# Altium PCB pcb.PcbDoc
Units mm, origin at the board's own origin, x right, y up, seen from the top; angles counter-clockwise.
Board outline 65 x 45 mm, 2 copper layers (Top Layer, Bottom Layer); 21 components, 15 nets, 84 pads, 0 vias.
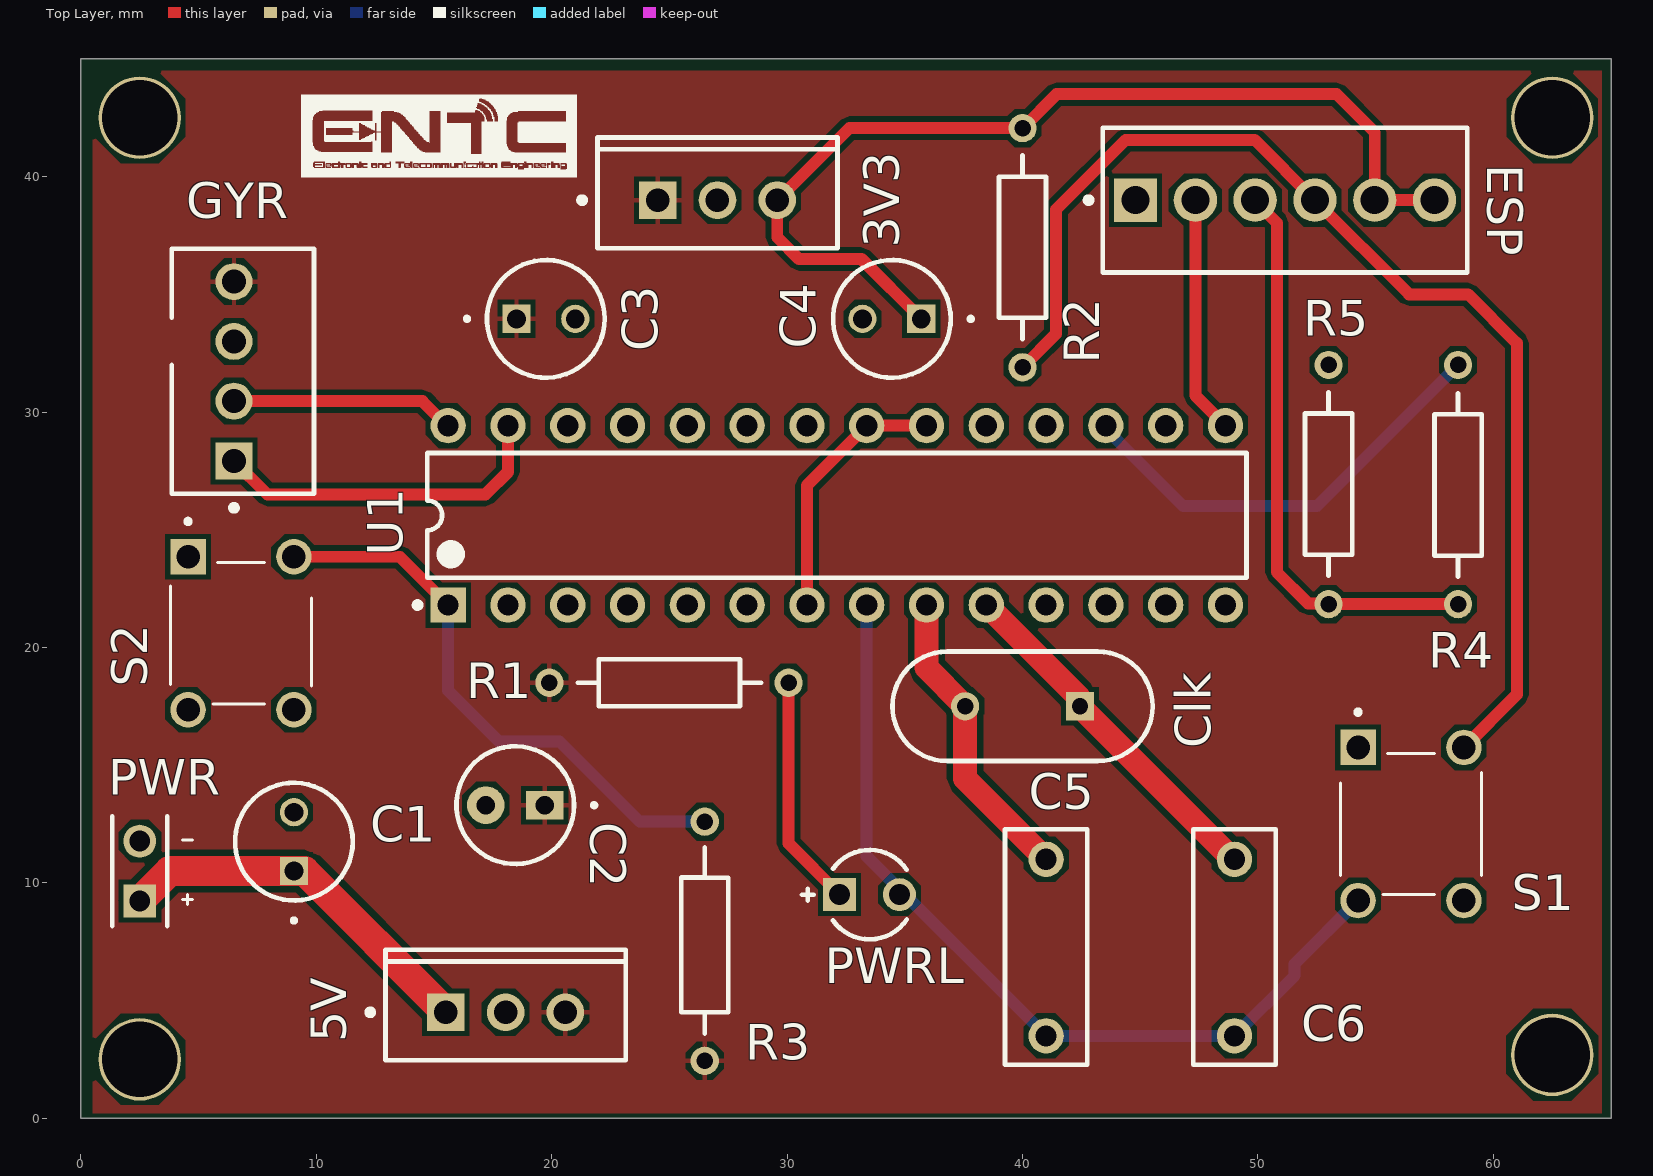
[diagram p0: Top Layer view]
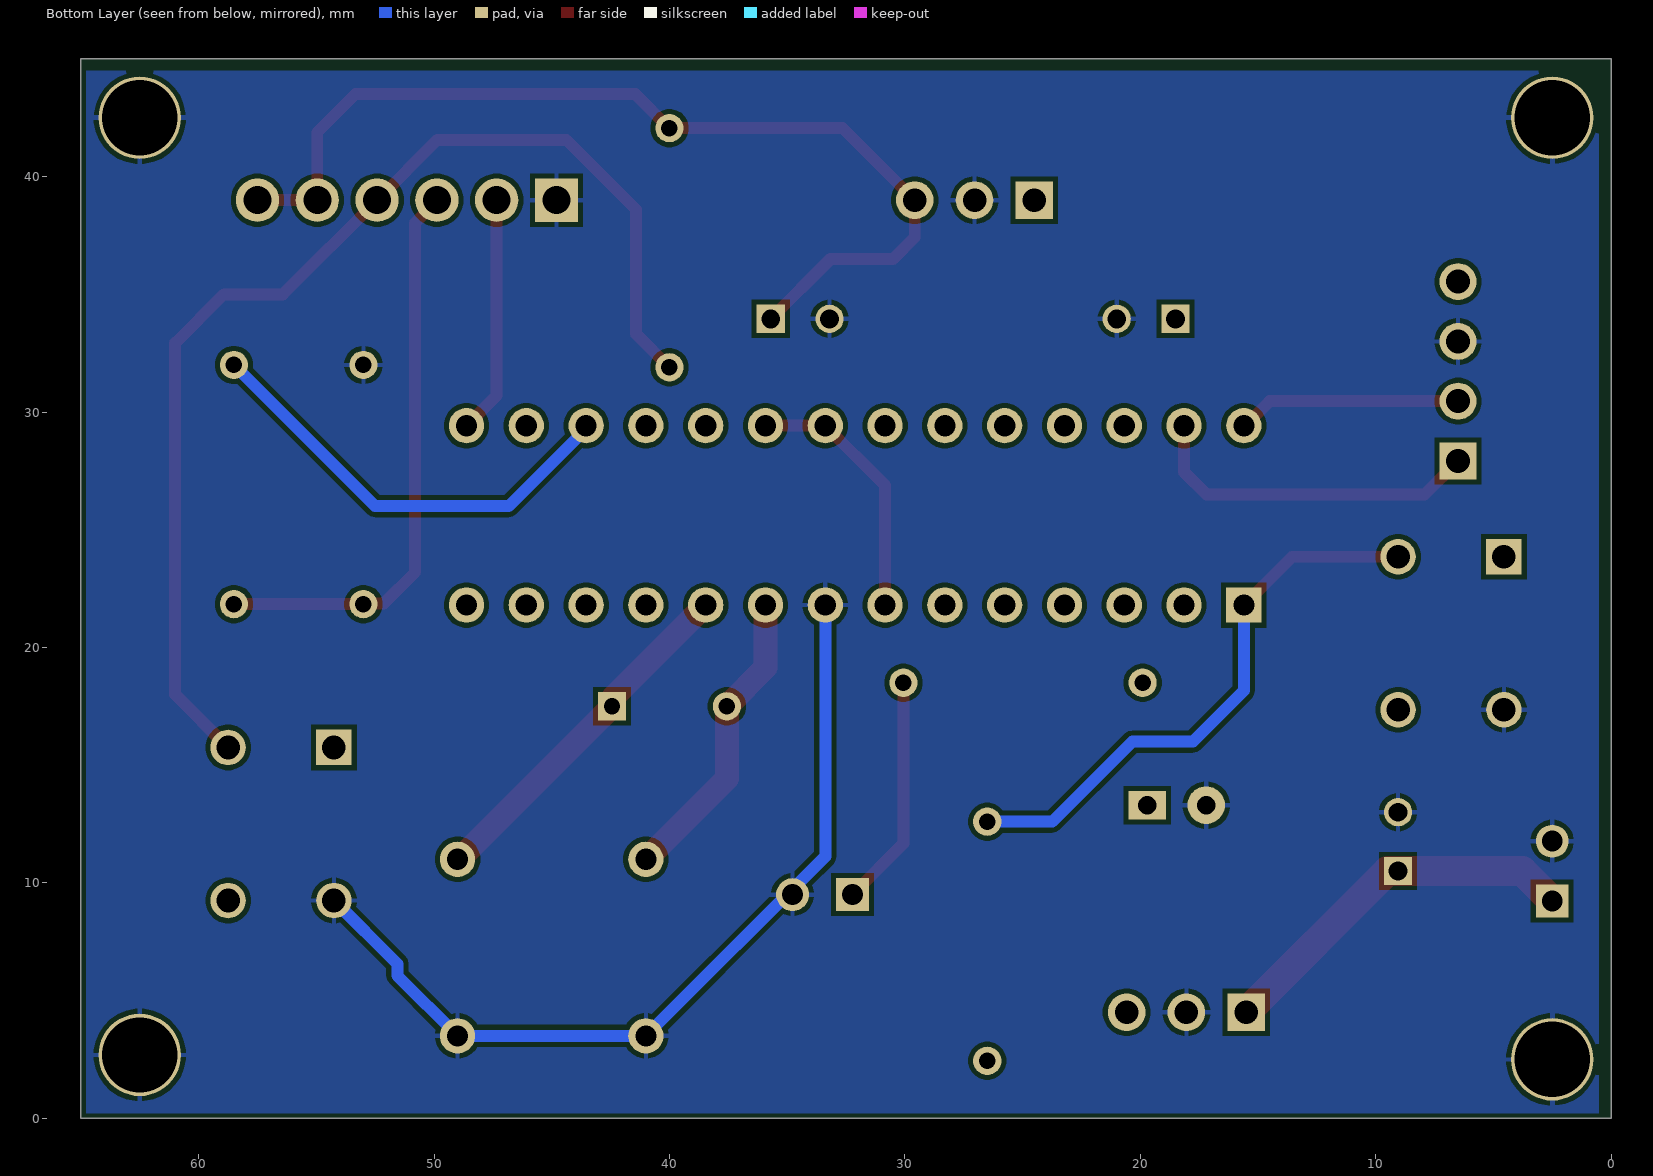
[diagram p1: Bottom Layer view, seen from below]
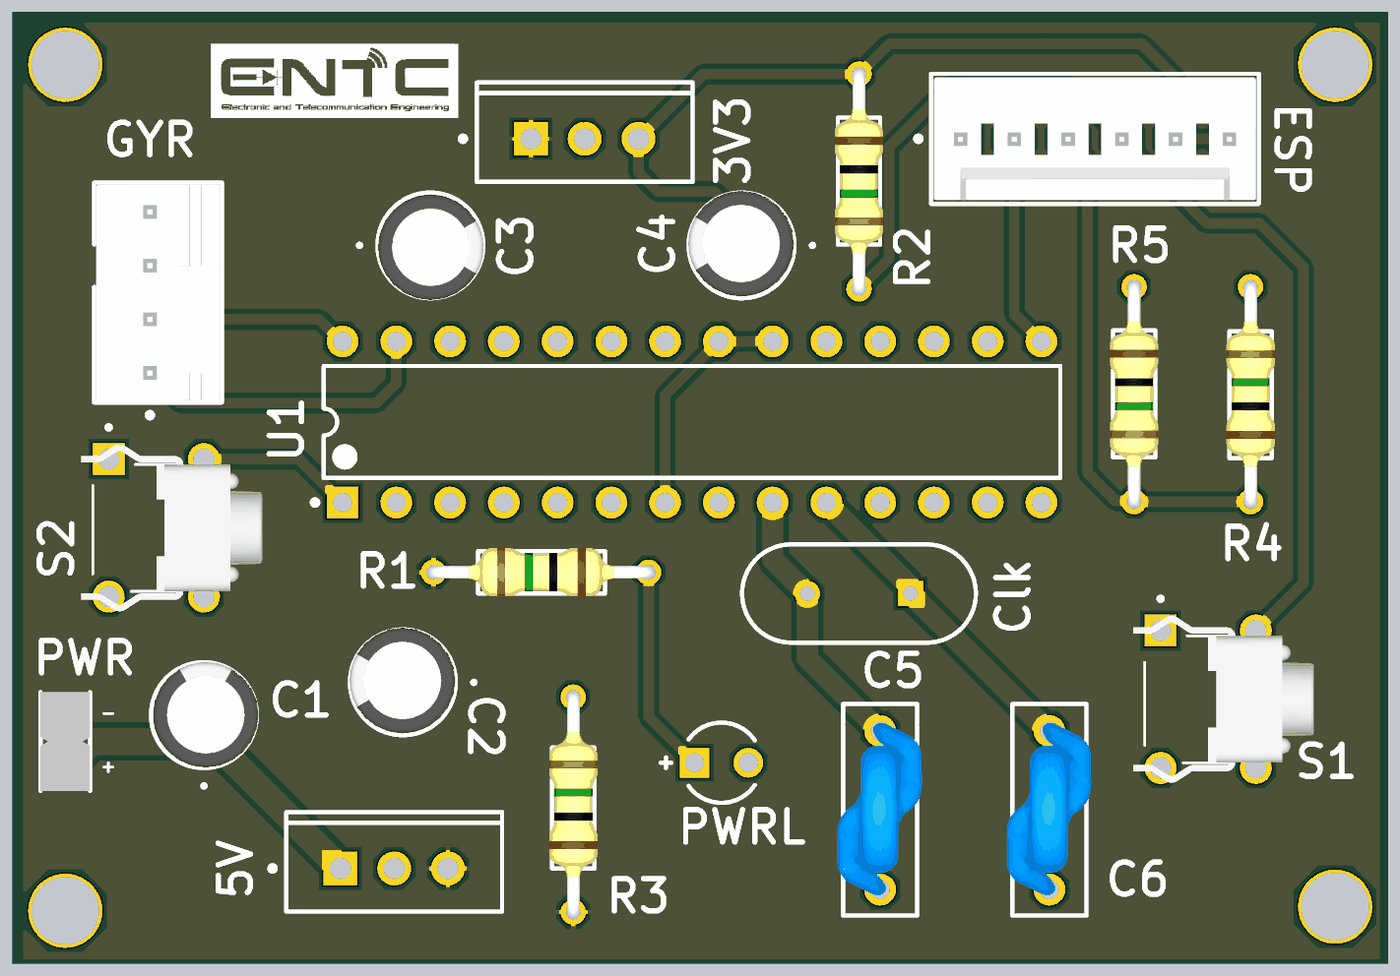
[diagram p2: 3D render of the assembled board from above, using the file's embedded part models]

## Layer stack, top to bottom
Top Solder: solder mask 0.0127, Solder Resist, Dk 3.5
Top Layer: signal copper 0.0356
Dielectric 1: dielectric 0.32, FR-4, Dk 4.8
Bottom Layer: signal copper 0.0356
Bottom Solder: solder mask 0.0127, Solder Resist, Dk 3.5

## Board outline
0,0 65,0 65,45 0,45

## Design rules (kind name [scope] priority, off if disabled: settings)
BoardOutlineClearance [All] p1: gap=0.2 ignorepadtopadclearanceinfootprint=FALSE
Clearance [All] p1: gap=0.203 ignorepadtopadclearanceinfootprint=FALSE except(0.25: Arc-Hole Track-Hole SMDPad-Hole THPad-Hole Via-Hole Fill-Hole Poly-Hole Region-Hole Text-Hole)
ComponentClearance [All] p1: gap=0.127 collisioncheckmode=3 verticalgap=0.127 showdistances=TRUE
DiffPairsRouting [All] p1: maxlimit=0.381 minlimit=0.203 mostfreqgap=0.203 toplayer_minwidth=0.203 toplayer_maxwidth=25.4 toplayer_prefwidth=0.203 bottomlayer_minwidth=0.203 bottomlayer_maxwidth=25.4 bottomlayer_prefwidth=0.203 maxuncoupledlength=12.7
Height [All] p1: minheight=0 maxheight=1816.048 prefheight=12.7
HoleSize [All] p1: absolutevalues=TRUE maxlimit=6.3 minlimit=0.3 maxpercent=80.000 minpercent=20.000
HoleToHoleClearance [All] p1: gap=0.25 allowstackedmicrovias=FALSE
MinimumAnnularRing [All] p1: minimumring=0.076
MinimumSolderMaskSliver [All] p1: minsoldermaskwidth=0
PlaneClearance [All] p1: clearance=0.203
PlaneConnect PlaneConnectPowerPads [InPadClass('PowerPads')] p1: planeconnectstyle=Direct reliefexpansion=0.508 reliefentries=4 reliefconductorwidth=0.254 reliefairgap=0.254
PlaneConnect [All] p2: pad.planeconnectstyle=Relief pad.reliefexpansion=0.3 pad.reliefentries=4 pad.reliefconductorwidth=0.203 pad.reliefairgap=0.203 via.planeconnectstyle=Direct via.reliefexpansion=0.3 via.reliefentries=4 via.reliefconductorwidth=0.127 via.reliefairgap=0.127
PolygonConnect PolygonConnectPowerPads [All vs (InPadClass('PowerPads'))] p1: connectstyle=Direct reliefconductorwidth=0.254 reliefentries=4 polygonreliefangle="90 Angle" airgapwidth=0.254
PolygonConnect [All] p2: thpad.connectstyle=Relief thpad.reliefconductorwidth=0.203 thpad.reliefentries=4 thpad.polygonreliefangle="90 Angle" thpad.airgapwidth=0.203 smdpad.connectstyle=Relief smdpad.reliefconductorwidth=0.203 smdpad.reliefentries=4 smdpad.polygonreliefangle="90 Angle" smdpad.airgapwidth=0.203 via.connectstyle=Direct via.reliefconductorwidth=0.127 via.reliefentries=4 via.polygonreliefangle="90 Angle" via.airgapwidth=0.127
RoutingVias [All] p1: holewidth=0.3 width=0.6 viastyle="Through Hole" minholewidth=0.3 minwidth=0.6 maxholewidth=0.6 maxwidth=6.6
SilkToSilkClearance [All] p1: silktosilkclearance=0
SilkToSolderMaskClearance [IsPad] p1: minsilkscreentomaskgap=0.127 clearancetoexposedcopper=TRUE
SolderMaskExpansion [All] p1: expansion=0.075 istentingtop=FALSE
Width [All] p1: maxlimit=25.4 minlimit=0.203 preferedwidth=0.203 minimp=50.000000 maximp=50.000000 favimp=50.000000
20 further rules are at their usual default settings.

## Classes and differential pairs
component class schematic: 3V3 5V C1 C2 C5 C6 Clk ESP GYR PWRL R1 R2 R3 R4 R5 S1 S2 U1

## Components (designator, comment, footprint, x,y, rotation, side; value= is the part's Value field where it differs from the comment)
3V3 "BA033T" FAIR-TO-220-3 27.04,39 r90 top (schematic designator U3)
5V "LM7805CT" FAIR-TO-220-3 18.04,4.5 r90 top (schematic designator U2)
C1 "capacitor 10uF" Capacitor10uF#1 9.05,11.75 r90 top value=10uF
C2 "capacitor 10uF" Capacitor10uF#2 18.45,13.3 r180 top value=10uF
C3 "capacitor 10uF" Capacitor10uF#1 19.75,33.958 r0 top value=10uF
C4 "capacitor 10uF" Capacitor10uF#1 34.45,33.958 r180 top value=10uF
C5 "capacitor 22pF" "CAPACITOR - DUPLICATE" 41,7.275 r270 top
C6 "capacitor 22pF" "Capacitor - duplicate" 49,7.275 r270 top
Clk "49S/18PF" JPY-49S-18PF 40,17.5 r180 top (schematic designator Y1)
ESP "22-27-2061" FP-22-27-2061-MFG 51.15,39 r0 top
GYR "47053-1000" FP-47053-1000-MFG 6.88,31.73 r270 top
PWR "pinheader2" TECO-5-146280-2_V 2.5,10.5 r90 top (schematic designator h1)
PWRL "LED1" INDPR60-254-520X380X650 33.5,9.5 r0 top (schematic designator LED1)
R1 "resistor 220" "Axial 0.4" 25,18.5 r0 top value=220R
R2 "resistor 10k" "Axial 0.4" 40,37 r90 top value=10kR
R3 "resistor 10k" "Axial 0.4" 26.5,7.5 r270 top value=10kR
R4 "resistor1k" "Axial 0.4" 58.5,26.9 r270 top value=1kR
R5 "resistor 2k" "Axial 0.4" 53,26.94 r90 top value=2kR
S1 "tacktile switch" SW_TL1105AF160Q 56.5,12.5 r270 top
S2 "tacktile switch" SW_TL1105AF160Q 6.8,20.603 r270 top
U1 "ATMEGA328P-PU" ATML-28P3 32.11,25.61 r90 top

## Footprints (in the part's own frame and the unit in brackets; to place one, negate y for a bottom-side part, rotate by r counter-clockwise, add the part's x,y. Pads: shape width x height; smd on the part's side, far side on the other; paste and mask are expansions set on the pad)
ATML-28P3 [mm] "DIP, 28-Leads, Body 34.8x7.2mm, Pitch 2.54mm"
  rect 1.5x1.5 hole 0.9: 1(-3.81,16.51)
  round 1.5 hole 0.9: 2(-3.81,13.97) 3(-3.81,11.43) 4(-3.81,8.89) 5(-3.81,6.35) 6(-3.81,3.81) 7(-3.81,1.27) 8(-3.81,-1.27) 9(-3.81,-3.81) 10(-3.81,-6.35) 11(-3.81,-8.89) 12(-3.81,-11.43) 13(-3.81,-13.97) 14(-3.81,-16.51) 15(3.81,-16.51) 16(3.81,-13.97) 17(3.81,-11.43) 18(3.81,-8.89) 19(3.81,-6.35) 20(3.81,-3.81) 21(3.81,-1.27) 22(3.81,1.27) 23(3.81,3.81) 24(3.81,6.35) 25(3.81,8.89) 26(3.81,11.43) 27(3.81,13.97) 28(3.81,16.51)
  silkscreen extent -3.93,-17.4 2.65,17.93, body extent -3.95,-17.4 3.95,17.4, height 4.58
"Axial 0.4" [mm]
  round 1.2 hole 0.7: 1(-5.1,0) 2(5.06,0)
  silkscreen extent -3.9,-1 3.9,1, body extent -5.4,-1.16 5.36,1.17, height 2.09
Capacitor10uF#1 [mm]
  round 1.2 hole 0.8: N(1.25,0)
  rect 1.2x1.2 hole 0.8: P(-1.25,0)
  silkscreen extent -3.4,-2.5 2.5,2.5, body extent -2.47,-2.59 2.52,2.41, height 12
Capacitor10uF#2 [mm]
  round 1.6 hole 0.8: N(1.25,0)
  rect 1.6x1.2 hole 0.8: P(-1.25,0)
  silkscreen extent -3.4,-2.5 2.5,2.5, body extent -2.47,-2.59 2.52,2.41, height 12
"CAPACITOR - DUPLICATE" [mm]
  round 1.5 hole 0.9: 1(-3.725,0) 2(3.775,0)
  silkscreen extent -5,-1.75 5,1.75, body extent -4.1,-2.03 4.04,1.97, height 10.98
"Capacitor - duplicate" [mm]
  round 1.5 hole 0.9: 1(-3.725,0) 2(3.775,0)
  silkscreen extent -5,-1.75 5,1.75, body extent -4.1,-2.03 4.04,1.97, height 10.98
FAIR-TO-220-3 [mm] "FM, 3-Leads, Body 10.2x4.7mm, Pitch 2.54mm"
  rect 1.6x1.6 hole 1: 1(0,2.54)
  round 1.6 hole 1: 2(0,0) 3(0,-2.54)
  silkscreen extent -2.04,-5.1 2.66,5.87, body extent -2.04,-5.1 2.66,5.1, height 18.95
FP-22-27-2061-MFG [mm]
  rect 1.84x1.84 hole 1.19 paste-1000 mask+0: 1(-6.35,0)
  round 1.84 hole 1.19 paste-1000 mask+0: 2(-3.81,0) 3(-1.27,0) 4(1.27,0) 5(3.81,0) 6(6.35,0)
  silkscreen extent -8.47,-3.07 7.75,3.08, body extent -7.85,-3.17 7.85,3.17, height 0.25
FP-47053-1000-MFG [mm]
  rect 1.57x1.57 hole 1.02 paste-1000 mask+0: 1(3.81,-0.38)
  round 1.57 hole 1.02 paste-1000 mask+0: 2(1.27,-0.38) 3(-1.27,-0.38) 4(-3.81,-0.38)
  silkscreen extent -5.2,-3.02 5.92,3.02, body extent -5.3,-3.26 5.3,3.12, height 0.25
INDPR60-254-520X380X650 [mm] "THD, 2-Leads, Dia 3.8mm, Pitch 2.54mm"
  rect 1.4x1.4 hole 0.9: 1(-1.27,0)
  round 1.4 hole 0.9: 2(1.27,0)
  silkscreen extent -2.87,-1.9 1.58,1.9, body extent -1.9,-1.9 1.9,1.9, height 6.5
JPY-49S-18PF [mm] "THD, 2-Leads, Body 11.05x4.65mm, Pitch 4.88mm"
  rect 1.2x1.2 hole 0.7: 1(-2.44,0)
  round 1.2 hole 0.7: 2(2.44,0)
  silkscreen extent -5.53,-2.32 5.53,2.33, body extent -5.52,-2.32 5.53,2.33, height 3.5
SW_TL1105AF160Q [mm]
  rect 1.508x1.508 / inner round 1.508 / far side rect 1.508x1.508 hole 1: 1(-3.25,-2.25)
  round 1.508 hole 1: 2(3.25,-2.25) 3(-3.25,2.25) 4(3.25,2.25)
  silkscreen extent -4.85,-3 3,3, body extent -3.95,-3 3.95,3, height 5
TECO-5-146280-2_V [mm] "Connector, 2-Leads, Body 4.67x2.34mm, Pitch 2.54mm"
  rect 1.4x1.4 hole 0.89: 1(-1.27,0)
  round 1.4 hole 0.89: 2(1.27,0)
  silkscreen extent -2.33,-1.17 2.34,1.17, body extent -2.34,-1.17 2.34,1.17, height 5.33

## Part data
3V3 5V: library part CMP-019-00050-1, "Fixed Positive Standard Regulator, 5VBIPolar, PSFM3", Case/Package=TO-220, Max Supply Voltage=25V, Pins=3, RoHS Compliant=Yes
C1 C2 C3 C4: library part "ECA-1HM100I (2)", "Aluminum Electrolytic Capacitor, Polarized, Aluminum (wet), 50V, 20% +Tol, 20% -Tol, 10uF, Through Hole Mount", Capacitor Type=Aluminium, Leakage Current=5uA, Manufacturer=Panasonic, Manufacturer Part Number=ECA-1HM100I, Max Operating Temperature=85°C, Min Operating Temperature=-40°C, Package Shape=Cylindrical, Package Style=RadialMeter, Rated DC Voltage (URdc)=50V, Ripple Current=65mA, Supplier Part Number=667-ECA-1HM100I, Tolerance  (fill in as +-)=20%, Category="Aluminum Electrolytic Capacitors", ComponentLink1Description=https://datasheet.ciiva.com:443/pdfs/VipMasterIC/IC/PANA/PANA-S-A0009891632/PANA-S-A0009891632-1.pdf?src-supplier=IHS+Markit, ComponentLink1URL=https://datasheet.ciiva.com:443/pdfs/VipMasterIC/IC/PANA/PANA-S-A0009891632/PANA-S-A0009891632-1.pdf?src-supplier=IHS+Markit, ComponentLink2Description=https://datasheet.ciiva.com/14608/70067785-14608821.pdf?src-supplier=Allied+Electronics, ComponentLink2URL=https://datasheet.ciiva.com/14608/70067785-14608821.pdf?src-supplier=Allied+Electronics, ComponentLink3Description=https://datasheet.ciiva.com/15197/getdatasheetpartid-238364-15197946.pdf?src-supplier=Verical, ComponentLink3URL=https://datasheet.ciiva.com/15197/getdatasheetpartid-238364-15197946.pdf?src-supplier=Verical, ComponentLink4Description=https://datasheet.ciiva.com/7794/1907780-7794379.pdf?src-supplier=Element14, ComponentLink4URL=https://datasheet.ciiva.com/7794/1907780-7794379.pdf?src-supplier=Element14, ComponentLink5Description=https://datasheet.ciiva.com/2984/aba0000ce12-2984335.pdf?src-supplier=Avnet, ComponentLink5URL=https://datasheet.ciiva.com/2984/aba0000ce12-2984335.pdf?src-supplier=Avnet, ComponentLink6Description=https://datasheet.ciiva.com/6121/aba0000ce12-6121535.pdf?src-supplier=Farnell, ComponentLink6URL=https://datasheet.ciiva.com/6121/aba0000ce12-6121535.pdf?src-supplier=Farnell, ComponentLink7Description=https://datasheet.ciiva.com/28677/aba0000ce12-28677830.pdf?src-supplier=Element14, ComponentLink7URL=https://datasheet.ciiva.com/28677/aba0000ce12-28677830.pdf?src-supplier=Element14, ComponentLink8Description=https://datasheet.ciiva.com/24234/aba0000ce12-465472-24234949.pdf?src-supplier=Mouser, ComponentLink8URL=https://datasheet.ciiva.com/24234/aba0000ce12-465472-24234949.pdf?src-supplier=Mouser, Diameter=5mm, Dielectric Material=Aluminium, JESD-609 Code=e3, Length=11mm, Mounting Technology="Through Hole", Packaging="Tape and Reel", Pins=2, Polarity=Polarized, Pricing="1=0.28, 10=0.193, 50=0.116, 100=0.098, 400=0.06, 1000=0.06, 2000=0.056, 4000=0.051, 8000=0.048, 10000=0.048 (USD)", Reach SVHC Compliant=Yes, RoHS=Yes, RoHS Compliant=Yes, Stock=35307, Supplier=Mouser, Tan Delta=0.12, Terminal Finish=Tin, Terminal Pitch=2.5mm, Termination=Wire, Tolerance (fill in as +-)=20%
C5 C6: library part DE21XSA220KN3AX02F, "Ceramic Capacitor, Ceramic, 10% +Tol, 10% -Tol, SL, -1000/+350ppm/Cel TC, 0.000022uF, Through Hole Mount", Manufacturer=Murata, Supplier Part Number=81-DE21XSA220KN3AX2F, Category="Ceramic Capacitors", Manufacturer Part Number=DE21XSA220KN3AX02F, Pricing="1=0.38, 10=0.252, 50=0.252, 100=0.151, 1000=0.095, 10000=0.09 (USD)", RoHS=Yes, Stock=156, Supplier=Mouser
Clk: library part CMP-003-00000-2, "Crystal, 16 MHz, +/-20 ppm, 18 pF, -20 to 70 degC, 2-Pin THD, RoHS", Case/Package=49S-18PF, Frequency=16MHz, Manufacturer="Shenzhen Jingpengyuan", Package Description="2-Pin Through Hole Device, Body 11.05 x 4.65 mm, Pitch 4.88 mm", Datasheet URL=http://datasheet.octopart.com/49S-18PF-Xinhunjing-datasheet-30677139.pdf, Datasheet Version=Aug-14, Manufacturer URL=http://www.chjiahui.com/, Mounting Technology=TH, Package Reference=49S-18PF, RoHS Compliant=Unknown
ESP: library part CMP-04776-000309-1, "CONN HEADER VERT 6POS 2.54MM", Color=Natural, Contact Resistance=10mR, Current Rating=4A, Flammability Rating="UL94 V-0", Housing Color=White, Max Operating Temperature=75°C, Max Voltage Rating (AC)=250V, Min Operating Temperature=0°C, Package Quantity=10000, Connector Type="Male Pin", Contact Material=Brass, Contact Mating Length=0.295inch, Contact Plating=Tin, Contact Type="Male Pin", Depth=5.8mm, Fastening Type=Friction, Gender=Male, Hole Diameter=1.02mm, Housing Material=Nylon, Lead Pitch=2.54mm, Length=15.24mm, Material=Nylon, Max Current Rating=4A, Mount="Through Hole", Number of Contacts=6, Number of Positions=6, Number of Rows=1, Orientation=Straight, Packaging=Bulk, Pitch=2.54mm, Radiation Hardening=No, REACH SVHC="No SVHC", Series=KK, Termination=Solder, Voltage Rating=250V, Voltage Rating (AC)=250V, Working Voltage=250V
GYR: library part CMP-04776-000290-1, "CONN HEADER VERT 4POS 2.54MM", Current Rating=4A, Housing Color=Beige, Max Operating Temperature=75°C, Min Operating Temperature=0°C, Package Quantity=12000, Voltage Rating=250V, Contact Material=Brass, Contact Plating=Tin, Depth=5.84mm, Gender=Male, Glow Wire Compliant=Non-compliant, Halogen Free="Low Halogen", Housing Material=Nylon, Length=10.2mm, Mount="Through Hole", Number of Circuits=4, Number of Contacts=4, Number of Positions=4, Number of Rows=1, Orientation=Vertical, Packaging=Bulk, Pitch=2.54mm, Radiation Hardening=No, Series=47053, Termination="Through Hole", Voltage Rating (DC)=250V
PWRL: library part CMP-007-00018-2, "LED Uni-Color Red, 100 mW, 30 mA, -55 to 100 degC, 2-Pin THD, RoHS, Bulk", Case/Package=Radial, Colour=Red, Forward Current=20mA, Forward Voltage=2V, Manufacturer=Lite-On, Max Operating Temperature=100°C, Min Operating Temperature=-55°C, Package Description="2-Pin Through Hole Device, Dia 3.8 mm, Pitch 2.54 mm", Package Quantity=1000, Package Reference=LTL-1CHE, Datasheet URL=https://datasheet.ciiva.com/15117/getdatasheetpartid-187746-15117985.pdf, Datasheet Version=Dec-03, Illumination Colour=Red, Lens Style=Dome, Luminous Intensity=12.6mcd, Manufacturer URL=http://www.us.liteon.com/, Mounting Technology=TH, Nominal Vf=2V, Packaging=Bulk, Pins=2, RoHS Compliant=True, Viewing Angle=60degrees
R1: library part CF14JT220R, "Fixed Resistor, Carbon Film, 0.25W, 220ohm, 350V, 5% +/-Tol, -400,0ppm/Cel, Through Hole Mount", Manufacturer="Stackpole Electronics", Max Operating Temperature=155°C, Min Operating Temperature=-55°C, Package Diameter=2.3mm, Package Length=6mm, Package Shape=Tubular, Package Style=AxialMeter, Power=250mW, Rated Temperature=70°C, Resistor Type="FIXED RESISTOR", Supplier Part Number=CF14JT220RCT-ND, Temperature Coefficient=400ppm/°C, Tolerance=5%, Working Voltage=350V, Category="Through-Hole Resistors", ComponentLink1Description=https://datasheet.ciiva.com:443/pdfs/VipMasterIC/IC/SEIE/SEIE-S-A0009883960/SEIE-S-A0009883960-1.pdf?src-supplier=IHS+Markit, ComponentLink1URL=https://datasheet.ciiva.com:443/pdfs/VipMasterIC/IC/SEIE/SEIE-S-A0009883960/SEIE-S-A0009883960-1.pdf?src-supplier=IHS+Markit, ComponentLink2Description=https://www.seielect.com/catalog/SEI-CF_CFM.pdf?src-supplier=Avnet, ComponentLink2URL=https://www.seielect.com/catalog/SEI-CF_CFM.pdf?src-supplier=Avnet, ComponentLink3Description=http://components.arrow.com/part/dataview/44988614S316465N1174?src-supplier=Arrow+Electronics, ComponentLink3URL=http://components.arrow.com/part/dataview/44988614S316465N1174?src-supplier=Arrow+Electronics, ComponentLink4Description=https://www.verical.com/server-webapp/html/getDatasheet?partID=375100&src-supplier=Verical, ComponentLink4URL=https://www.verical.com/server-webapp/html/getDatasheet?partID=375100&src-supplier=Verical, ComponentLink5Description=https://www.seielect.com/catalog/SEI-Packaging.pdf?src-supplier=Digi-Key, ComponentLink5URL=https://www.seielect.com/catalog/SEI-Packaging.pdf?src-supplier=Digi-Key, Construction=Tubular, JESD-609 Code=e3, Lead Diameter=0.55mm, Lead Length=28mm, Manufacturer Part Number=CF14JT220R, Mounting Technology="Through Hole", Packaging="Tape and Reel", Pins=2, Pricing="1=0.1, 10=0.056, 25=0.0404, 50=0.0308, 100=0.0226, 250=0.01728, 500=0.01382, 1000=0.01017 (USD)", Reach SVHC Compliant=Yes, RoHS=Yes, RoHS Compliant=Yes, Stock=166405, Supplier=Digi-Key, Technology="CARBON FILM", Terminal Finish=Tin, Termination=Wire
R2 R3: library part CF14JT10K0, "Fixed Resistor, Carbon Film, 0.25W, 10000ohm, 350V, 5% +/-Tol, -500,0ppm/Cel, Through Hole Mount", Manufacturer="Stackpole Electronics", Max Operating Temperature=155°C, Min Operating Temperature=-55°C, Package Diameter=2.3mm, Package Length=6mm, Package Shape=Tubular, Package Style=AxialMeter, Power=250mW, Rated Temperature=70°C, Resistor Type="FIXED RESISTOR", Supplier Part Number=CF14JT10K0TR-ND, Temperature Coefficient=500ppm/°C, Tolerance=5%, Working Voltage=350V, Category="Through-Hole Resistors", ComponentLink1Description=https://datasheet.ciiva.com:443/pdfs/VipMasterIC/IC/SEIE/SEIE-S-A0009883960/SEIE-S-A0009883960-1.pdf?src-supplier=IHS+Markit, ComponentLink1URL=https://datasheet.ciiva.com:443/pdfs/VipMasterIC/IC/SEIE/SEIE-S-A0009883960/SEIE-S-A0009883960-1.pdf?src-supplier=IHS+Markit, ComponentLink2Description=http://components.arrow.com/part/dataview/27619991S9848636N1174?src-supplier=Arrow+Electronics, ComponentLink2URL=http://components.arrow.com/part/dataview/27619991S9848636N1174?src-supplier=Arrow+Electronics, ComponentLink3Description=https://www.seielect.com/catalog/SEI-CF_CFM.pdf?src-supplier=Avnet, ComponentLink3URL=https://www.seielect.com/catalog/SEI-CF_CFM.pdf?src-supplier=Avnet, ComponentLink4Description=https://www.seielect.com/catalog/SEI-Packaging.pdf?src-supplier=Digi-Key, ComponentLink4URL=https://www.seielect.com/catalog/SEI-Packaging.pdf?src-supplier=Digi-Key, ComponentLink5Description=https://www.verical.com/server-webapp/html/getDatasheet?partID=367360&src-supplier=Verical, ComponentLink5URL=https://www.verical.com/server-webapp/html/getDatasheet?partID=367360&src-supplier=Verical, ComponentLink6Description=http://www.seielect.com/Catalog/SEI-CF_CFM.pdf?src-supplier=Future+Electronics, ComponentLink6URL=http://www.seielect.com/Catalog/SEI-CF_CFM.pdf?src-supplier=Future+Electronics, Construction=Tubular, JESD-609 Code=e3, Lead Diameter=0.55mm, Lead Length=28mm, Manufacturer Part Number=CF14JT10K0, Mounting Technology="Through Hole", Packaging="Tape and Reel", Pins=2, Pricing="5000=0.00729, 10000=0.00633, 25000=0.00557, 50000=0.0051, 125000=0.005 (USD)", Reach SVHC Compliant=Yes, RoHS=Yes, RoHS Compliant=Yes, Supplier=Digi-Key, Technology="CARBON FILM", Terminal Finish=Tin, Termination=Wire
R4: library part CF14JT1K00, "Fixed Resistor, Carbon Film, 0.25W, 1000ohm, 350V, 5% +/-Tol, -400,0ppm/Cel, Through Hole Mount", Manufacturer="Stackpole Electronics", Max Operating Temperature=155°C, Min Operating Temperature=-55°C, Package Diameter=2.3mm, Package Length=6mm, Package Shape=Tubular, Package Style=AxialMeter, Power=250mW, Rated Temperature=70°C, Resistor Type="FIXED RESISTOR", Supplier Part Number=CF14JT1K00CT-ND, Temperature Coefficient=400ppm/°C, Tolerance=5%, Working Voltage=350V, Category="Through-Hole Resistors", ComponentLink1Description=https://datasheet.ciiva.com:443/pdfs/VipMasterIC/IC/SEIE/SEIE-S-A0009883960/SEIE-S-A0009883960-1.pdf?src-supplier=IHS+Markit, ComponentLink1URL=https://datasheet.ciiva.com:443/pdfs/VipMasterIC/IC/SEIE/SEIE-S-A0009883960/SEIE-S-A0009883960-1.pdf?src-supplier=IHS+Markit, ComponentLink2Description=http://components.arrow.com/part/dataview/27620077S9848643N1174?src-supplier=Arrow+Electronics, ComponentLink2URL=http://components.arrow.com/part/dataview/27620077S9848643N1174?src-supplier=Arrow+Electronics, ComponentLink3Description=http://www.seielect.com/Catalog/SEI-CF_CFM.pdf?src-supplier=Future+Electronics, ComponentLink3URL=http://www.seielect.com/Catalog/SEI-CF_CFM.pdf?src-supplier=Future+Electronics, ComponentLink4Description=https://www.seielect.com/catalog/SEI-CF_CFM.pdf?src-supplier=Avnet, ComponentLink4URL=https://www.seielect.com/catalog/SEI-CF_CFM.pdf?src-supplier=Avnet, ComponentLink5Description=https://www.seielect.com/catalog/SEI-Packaging.pdf?src-supplier=Digi-Key, ComponentLink5URL=https://www.seielect.com/catalog/SEI-Packaging.pdf?src-supplier=Digi-Key, ComponentLink6Description=https://www.seielect.com/Catalog/SEI-CF_CFM.pdf?src-supplier=Digi-Key, ComponentLink6URL=https://www.seielect.com/Catalog/SEI-CF_CFM.pdf?src-supplier=Digi-Key, ComponentLink7Description=https://www.verical.com/server-webapp/html/getDatasheet?partID=360403&src-supplier=Verical, ComponentLink7URL=https://www.verical.com/server-webapp/html/getDatasheet?partID=360403&src-supplier=Verical, Construction=Tubular, JESD-609 Code=e3, Lead Diameter=0.55mm, Lead Length=28mm, Manufacturer Part Number=CF14JT1K00, Mounting Technology="Through Hole", Packaging="Tape and Reel", Pins=2, Pricing="1=0.1, 10=0.056, 25=0.0404, 50=0.0308, 100=0.0226, 250=0.01728, 500=0.01382, 1000=0.01017 (USD)", Reach SVHC Compliant=Yes, RoHS=Yes, RoHS Compliant=Yes, Stock=2294681, Supplier=Digi-Key, Technology="CARBON FILM", Terminal Finish=Tin, Termination=Wire
R5: library part CF14JT2K00, "Res Carbon Film 2K Ohm 5% 1/4W -400ppm/°C to 0ppm/°C Conformal AXL Thru-Hole T/R", Case/Package=Conformal, Manufacturer="Stackpole Electronics", Max Operating Temperature=155°C, Max Power Dissipation=250mW, Min Operating Temperature=-55°C, Temperature Coefficient=-400ppm/°C, Tolerance=5%, Category="Through-Hole Resistors", ComponentLink1Description=https://www.verical.com/server-webapp/html/getDatasheet?partID=473981&src-supplier=Verical, ComponentLink1URL=https://www.verical.com/server-webapp/html/getDatasheet?partID=473981&src-supplier=Verical, ComponentLink2Description=https://www.seielect.com/Catalog/SEI-CF_CFM.pdf?src-supplier=Digi-Key, ComponentLink2URL=https://www.seielect.com/Catalog/SEI-CF_CFM.pdf?src-supplier=Digi-Key, ComponentLink3Description=https://www.seielect.com/catalog/SEI-Packaging.pdf?src-supplier=Digi-Key, ComponentLink3URL=https://www.seielect.com/catalog/SEI-Packaging.pdf?src-supplier=Digi-Key, ComponentLink4Description=http://www.seielect.com/Catalog/SEI-CF_CFM.pdf?src-supplier=Future+Electronics, ComponentLink4URL=http://www.seielect.com/Catalog/SEI-CF_CFM.pdf?src-supplier=Future+Electronics, ComponentLink5Description=https://www.seielect.com/catalog/SEI-CF_CFM.pdf?src-supplier=Avnet, ComponentLink5URL=https://www.seielect.com/catalog/SEI-CF_CFM.pdf?src-supplier=Avnet, ComponentLink6Description=http://components.arrow.com/part/dataview/27620168S9848612N1174?src-supplier=Arrow+Electronics, ComponentLink6URL=http://components.arrow.com/part/dataview/27620168S9848612N1174?src-supplier=Arrow+Electronics, Construction=Cylindrical, Contact Plating=Tin,Matte, Diameter=2.3mm, Features="Flame Retardant Coating", Lead Free="Lead Free", Length=6.5mm, Manufacturer Part Number=CF14JT2K00, Military Standard=Not, Mounting Technology="Through Hole,Axial", Number of Terminations=2, Packaging="Tape and Reel", Power Rating=250mW, Pricing="1=0.0513, 10=0.0369, 25=0.0295, 100=0.0188, 250=0.015, 500=0.0122, 1000=0.0084 (USD)", Radiation Hardening=No, RoHS=Yes, RoHS Compliant=Yes, Series=CF, Stock=1847, Supplier="Arrow Electronics", Supplier Part Number=CF14JT2K00, Termination=Axial
S1 S2: library part TL1105AF160Q, "Keypad Switch, 1 Switches, SPST, Momentary-tactile, 0.05A, 12VDC, 2.06N, 4 PCB Hole Cnt, Solder Terminal, Through Hole-straight", Contact Current(DC)-Max=50mA, Contact DC Max Rating R Load=.05A@12VDC, Contact Voltage(DC)-Max=12V, Manufacturer=E-Switch, Manufacturer Series=TL1105, Max Operating Temperature=70°C, Min Operating Temperature=-20°C, Operating Force-Max=2.06N, Supplier Part Number=4125654, Body Breadth=6inch, Body Height=3.6mm, Body Length or Diameter=6mm, Category="Tactile Switches", Circuit Configuration=1X1, ComponentLink1Description=https://datasheet.ciiva.com:443/pdfs/VipMasterIC/IC/ESCH/ESCH-S-A0000509546/ESCH-S-A0000506372-1.pdf?src-supplier=IHS+Markit, ComponentLink1URL=https://datasheet.ciiva.com:443/pdfs/VipMasterIC/IC/ESCH/ESCH-S-A0000509546/ESCH-S-A0000506372-1.pdf?src-supplier=IHS+Markit, ComponentLink2Description=https://datasheet.ciiva.com/16156/p010002-16156245.pdf?src-supplier=Onlinecomponents.com, ComponentLink2URL=https://datasheet.ciiva.com/16156/p010002-16156245.pdf?src-supplier=Onlinecomponents.com, ComponentLink3Description=https://datasheet.ciiva.com/1701/tl1105-1701408.pdf?src-supplier=Newark, ComponentLink3URL=https://datasheet.ciiva.com/1701/tl1105-1701408.pdf?src-supplier=Newark, ComponentLink4Description=https://datasheet.ciiva.com/2900/tl1105-2900854.pdf?src-supplier=Digi-Key, ComponentLink4URL=https://datasheet.ciiva.com/2900/tl1105-2900854.pdf?src-supplier=Digi-Key, Electrical Life=100000Cycles, JESD-609 Code=e4, Manufacturer Part Number=TL1105AF160Q, Mounting Technology="Through Hole", Number of Switches=1, Pricing="1=0.185, 250=0.18, 1000=0.173, 2500=0.168, 10000=0.157 (USD)", Reach SVHC Compliant=Yes, RoHS=Yes, RoHS Compliant=Yes, Stock=5048, Supplier="Future Electronics", Switch Action=MOMENTARY-TACTILE, Switch Function=SPST, Switch Type=Keypad, Terminal Finish=Silver, Termination=Solder
U1: library part CMP-020-00004-3, "8-Bit Microcontroller with 32 KBytes In-System Programmable Flash, 23 I/Os, -40 to 85 degC, 28-Pin PDIP (28P3), RoHS, Tube", Case/Package=DIP, Manufacturer=Atmel, Max Clock Frequency=20MHz, Max Operating Temperature=85°C, Max Supply Voltage=5.5V, Min Operating Temperature=-40°C, Min Supply Voltage=1.8V, Package Description="28-Pin Plastic Dual Inline Package, Body 34.671 x 7.3025 mm, Pitch 2.54 mm", Package Quantity=14, Package Reference=28P3, Package Version="Rev. B, 09/2001", Datasheet URL=http://www.atmel.com/images/Atmel-8271-8-bit-AVR-Microcontroller-ATmega48A-48PA-88A-88PA-168A-168PA-328-328P_datasheet_Complete.pdf, Datasheet Version="Rev. 8271J, 11/2015", Density=32KB, Ethernet Channels=0, I/Os=23, Interface=USART, Manufacturer URL=http://www.atmel.com/, Mounting Technology=TH, Package URL=http://www.atmel.com/images/Atmel-8271-8-bit-AVR-Microcontroller-ATmega48A-48PA-88A-88PA-168A-168PA-328-328P_datasheet_Complete.pdf, Packaging=Rail/Tube, Pins=28, RAM Size=2KB, RoHS Compliant=True

## Free pads (board coordinates)
  round 3.5 hole 3.2: 3(2.5,2.5) 3(2.5,42.5) 3(62.5,2.691) 3(62.5,42.5)

## Nets (pads, with @x,y where several pads share a name; then routed paths per layer and width w, separated by ;. In a path a pad name is that pad's centre, name@x,y a point inside that pad or via, vN(x,y) a via of type N, cw(c..) or ccw(c..) an arc to the next point about the centre after c; other vN are vias at no path point)
11V1: 5V.1 C1.P PWR.1 | length 16
  Top Layer w1.27: PWR.1 3.77,10.5 5,10.5 C1.P 9.5,10.5 5V.1
+3.3V: 3V3.3 C4.P ESP.5 ESP.6 R2.2 | length 42.5
  Top Layer w0.508: C4.P 33.158,36.5 30.5,36.5 29.58,37.42 3V3.3 32.64,42.06 R2.2 41.44,43.5 53.34,43.5 54.96,41.88 ESP.5 ESP.6
+5V: 3V3.1 5V.3 C2.P C3.P GYR.4 R1.1 R3.2
GND: 3V3.2 5V.2 C1.N C2.N C3.N C4.N C5.2 C6.2 ESP.1 GYR.3 pad.3 PWR.2 PWRL.2 R5.2 S1.2 S2.2 U1.8 | length 37.4
  Bottom Layer w0.508: U1.8 33.38,11.12 C5.2 C6.2 51.557,6.057 51.557,6.557 S1.2
NetLED1_1: PWRL.1 R1.2 | length 9.9
  Top Layer w0.508: R1.2 30.06,11.67 PWRL.1
NetR3_1: R3.1 S2.3 U1.1 | length 24.2
  Top Layer w0.508: S2.3 13.547,23.853 U1.1
  Bottom Layer w0.508: U1.1 15.6,18.166 17.766,16 20.339,16 23.739,12.6 R3.1
NetR4_1: R4.1 U1.17 | length 18.9
  Bottom Layer w0.508: U1.17 43.54,29.29 46.83,26 52.5,26 R4.1
NetU1_7: U1.7 U1.20 U1.21 | length 11.2
  Top Layer w0.508: U1.7 30.84,26.88 U1.21 U1.20
PB6: C5.1 Clk.2 U1.9 | length 12.9
  Top Layer w1.016: U1.9 35.92,19.14 Clk.2 37.56,14.44 C5.1
PB7: C6.1 Clk.1 U1.10 | length 15.2
  Top Layer w1.016: U1.10 42.348,17.912 42.348,17.592 Clk.1 48.94,11 C6.1
RST: ESP.4 R2.1 S1.3 | length 49.8
  Top Layer w0.508: R2.1 41.417,33.317 41.417,38.598 44.384,41.565 49.855,41.565 ESP.4 56.42,35 58.924,35 61,32.924 61,18 S1.3
RX: ESP.3 R4.2 R5.1 | length 24.4
  Top Layer w0.508: ESP.3 49.88,38.956 50.8,38.036 50.8,23.2 52.125,21.875 52.965,21.875 R5.1 R4.2
SCL: GYR.2 U1.28 | length 9.5
  Top Layer w0.508: GYR.2 14.502,30.46 15.542,29.42 U1.28
SDA: GYR.1 U1.27 | length 14.6
  Top Layer w0.508: GYR.1 7.92,26.5 17.187,26.5 18.14,27.453 U1.27
TX: ESP.2 U1.15 | length 10.1
  Top Layer w0.508: ESP.2 47.34,30.7 U1.15
pads on no net: S1.1 S1.4 S2.1 S2.4 U1.2 U1.3 U1.4 U1.5 U1.6 U1.11 U1.12 U1.13 U1.14 U1.16 U1.18 U1.19 U1.22 U1.23 U1.24 U1.25 U1.26

## Polygon pours and split planes (outlines as drawn)
GND on Bottom Layer "GND_L02_P001" (solid, pour order 1): 64.775,44.5 64.775,0 0.525,0 0.525,44.5
+5V on Top Layer "+5V_L01_P002" (solid, pour order 2): 0.5,44.5 64.6,44.5 64.6,0 0.5,0

## Silkscreen, mask and mechanical layers (free items; w line width, h text height)
Top Overlay:
  region: 12.995,40.426 12.995,40.512 13.109,40.512 13.109,40.426 13.023,40.426
  region: 19.346,40.512 19.403,40.512 19.403,40.484 19.317,40.484 19.317,40.512
  region: 14.797,40.512 14.826,40.512 14.826,40.426 14.711,40.426 14.711,40.512 14.768,40.512
  region: 17.315,40.512 17.315,40.426 17.2,40.426 17.2,40.512 17.286,40.512
  region: 10.448,40.512 10.563,40.512 10.563,40.484 10.448,40.484
  region: 12.48,40.426 12.422,40.426 12.422,40.455 12.508,40.455 12.508,40.426
  region: 16.571,40.426 16.428,40.426 16.428,40.512 16.8,40.512 16.8,40.484 16.628,40.484 16.628,40.455 16.599,40.455 16.599,40.426
  region: 11.421,40.455 11.421,40.426 11.306,40.426 11.306,40.512 11.421,40.512 11.421,40.484
  region: 18.688,40.455 18.631,40.455 18.631,40.512 18.745,40.512 18.745,40.455 18.717,40.455
  region: 10.048,40.541 9.962,40.541 9.962,40.569 10.276,40.569 10.276,40.426 9.962,40.426 9.962,40.455 10.248,40.455 10.248,40.541 10.076,40.541
  region: 16.313,40.512 16.342,40.512 16.342,40.426 16.313,40.426 16.313,40.484
  region: 16.771,40.455 16.8,40.455 16.8,40.426 16.685,40.426 16.685,40.455 16.743,40.455
  region: 14.539,40.512 14.625,40.512 14.625,40.426 14.454,40.426 14.454,40.512 14.511,40.512
  region: 14.168,40.484 14.168,40.512 14.282,40.512 14.282,40.484 14.196,40.484
  region: 13.91,40.512 13.91,40.484 13.796,40.484 13.796,40.512 13.881,40.512
  region: 19.632,40.512 19.689,40.512 19.689,40.484 19.575,40.484 19.575,40.512 19.604,40.512
  region: 20.462,40.455 20.433,40.455 20.433,40.512 20.548,40.512 20.548,40.455 20.49,40.455
  region: 5 vertices and 38 holes, not listed, extent 9.361,39.969 21.063,43.488
  lines w0.127: 4.325,9.287 4.534,9.287 4.743,9.287 ; 4.325,11.82 4.743,11.82 ; 4.534,9.075 4.534,9.5 4.534,9.28 4.534,9.075
Mechanical 1:
  lines w0.051: 0,0 0,45 65,45 65,0 0,0
  lines w0.127: 1.465,98.5 1.566,98.398 ; 66.075,98.5 66.177,98.398 66.269,98.306